# Altium PCB DisplayBoard.PcbDoc
Units mm, origin at the board's own origin, x right, y up, seen from the top; angles counter-clockwise.
Board outline 80 x 64 mm, 2 copper layers (Top Layer, Bottom Layer); 38 components, 43 nets, 152 pads, 6 vias.
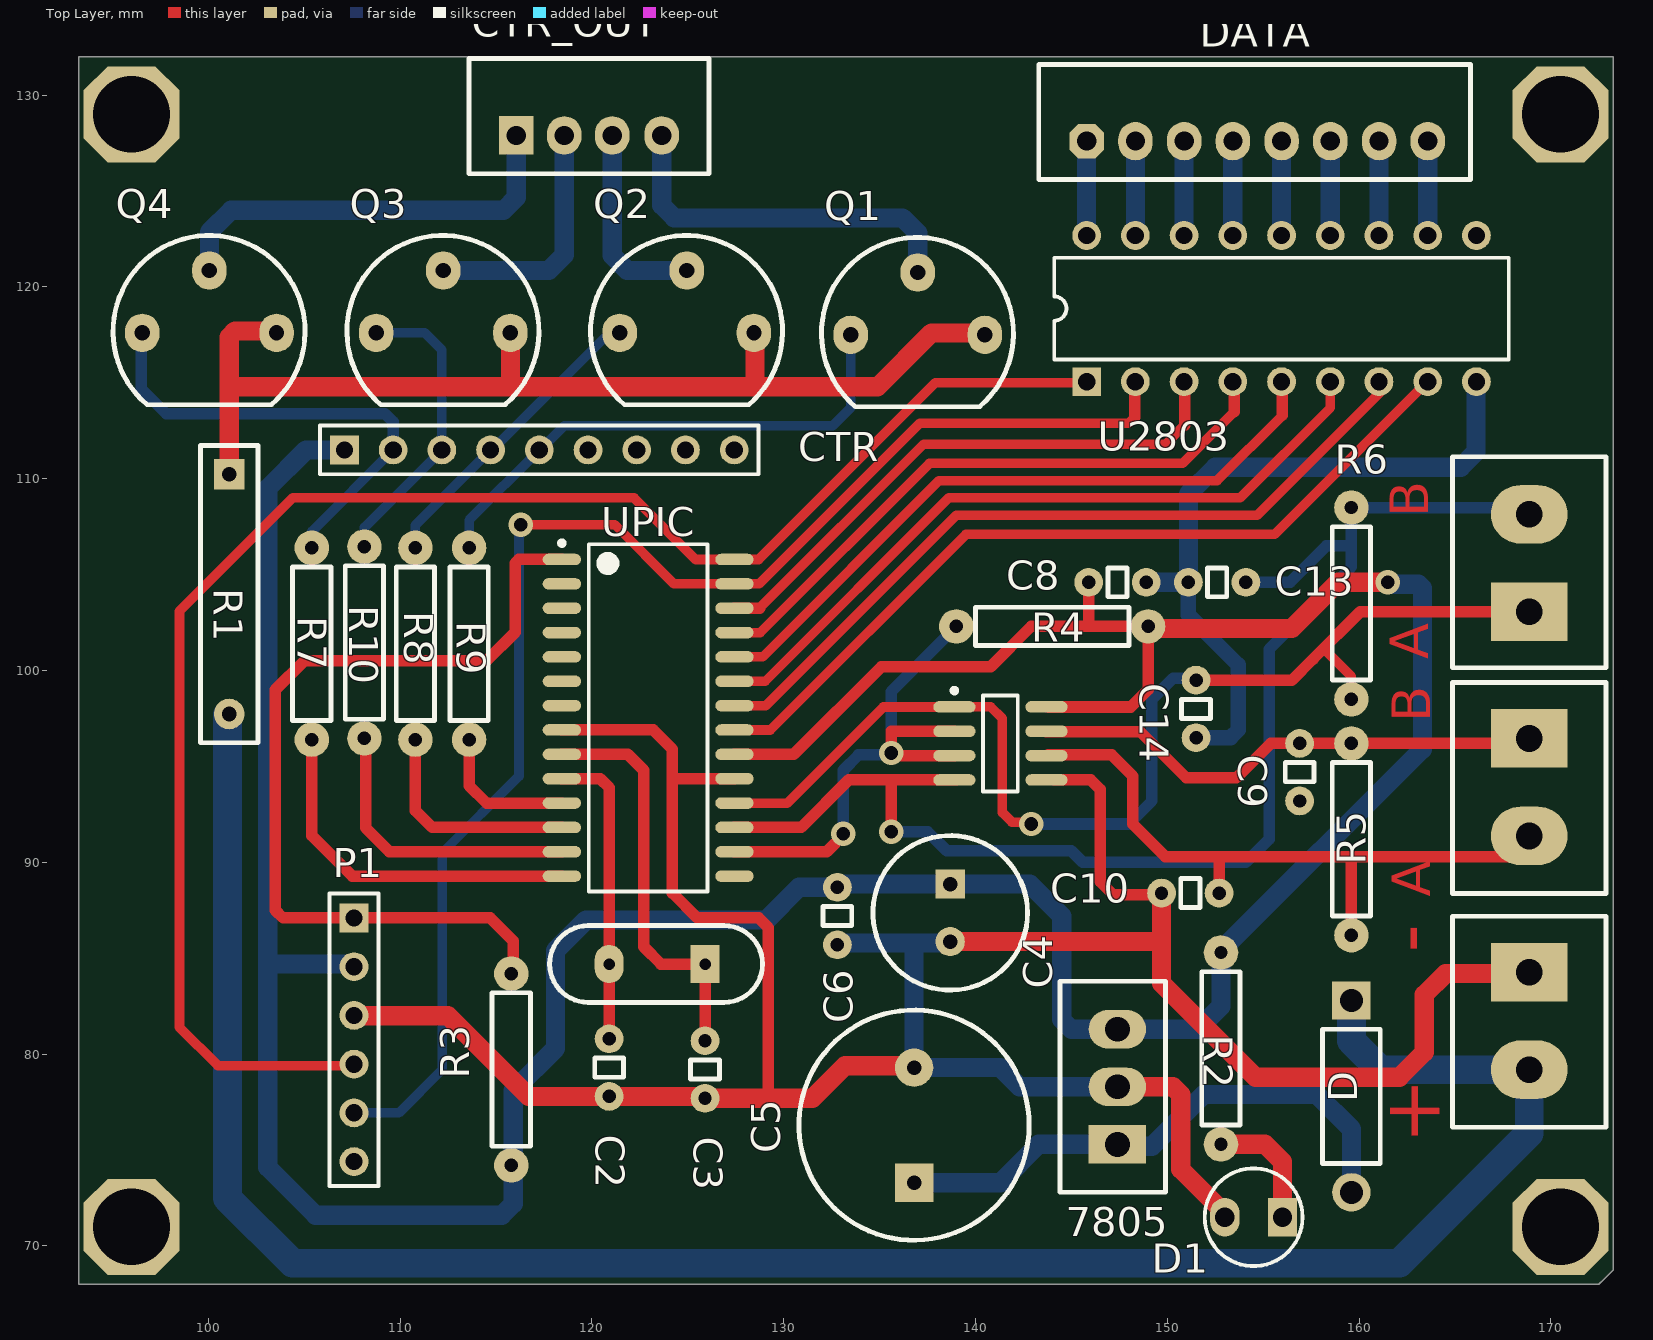
[diagram p0: Top Layer view]
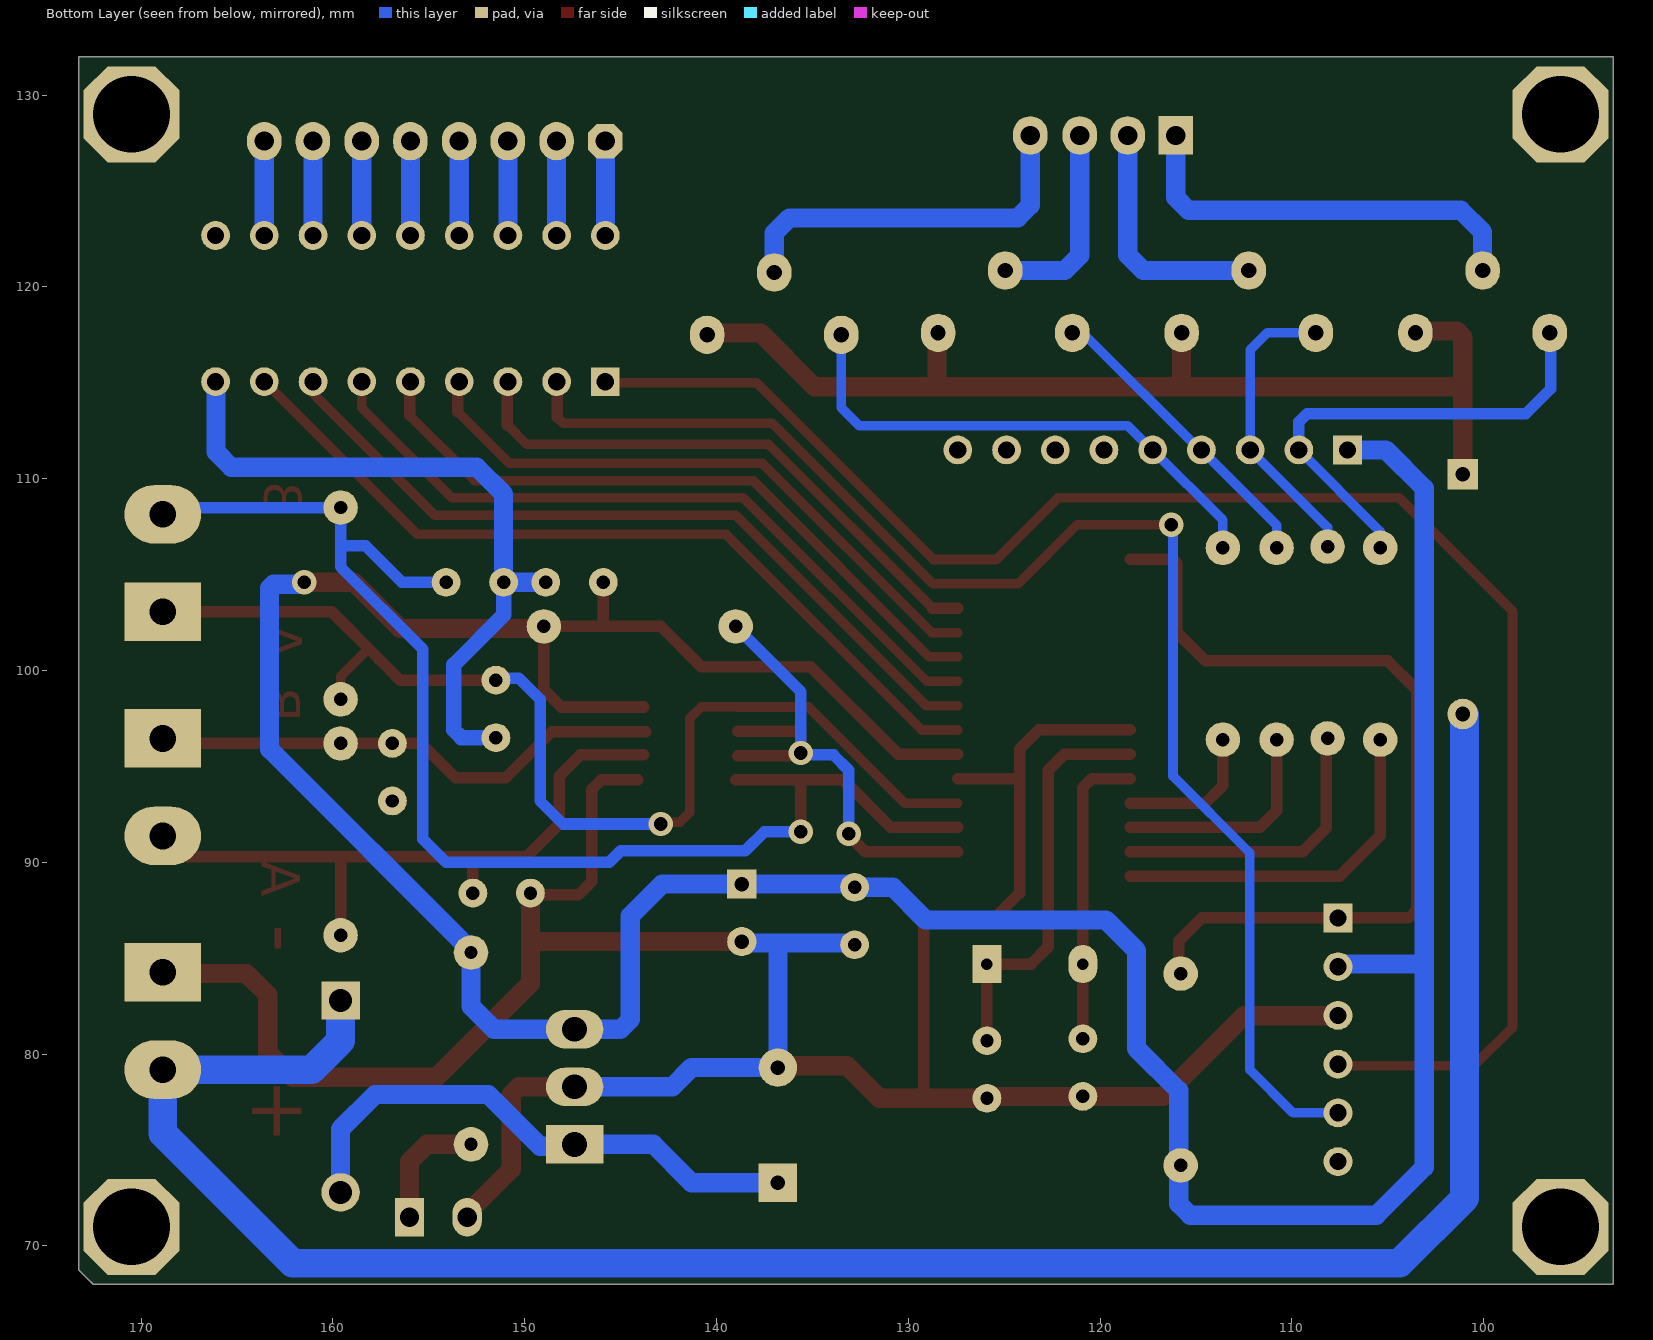
[diagram p1: Bottom Layer view, seen from below]

## Layer stack, top to bottom
Top Layer: signal copper 0.0356
Dielectric: dielectric 0.32, FR-4, Dk 4.8
Bottom Layer: signal copper 0.0356

## Board outline
93.25,132 173.25,132 173.25,68.75 172.75,68.25 172.5,68 93.25,68 93.25,132

## Design rules (kind name [scope] priority, off if disabled: settings)
Clearance [All] p1: gap=0.6
PlaneClearance [All] p1: clearance=1
PlaneConnect [All] p1: planeconnectstyle=Relief reliefexpansion=1 reliefentries=4 reliefconductorwidth=1 reliefairgap=1
PolygonConnect [All] p1: connectstyle=Relief reliefconductorwidth=1 reliefentries=4 polygonreliefangle="90 Angle"
RoutingTopology [All] p1: topology=Vertical
RoutingVias [All] p1: holewidth=1 width=1.5 viastyle="Through Hole" minholewidth=0.711 minwidth=1.27 maxholewidth=1.5 maxwidth=2
SilkscreenOverComponentPads [All] p1: minsilkscreentomaskgap=0.254
SolderMaskExpansion [All] p1: expansion=1
Width [InNet('VCC')] p1: maxlimit=2 minlimit=1 preferedwidth=1
24 further rules are at their usual default settings.

## Components (designator, comment, footprint, x,y, rotation, side; value= is the part's Value field where it differs from the comment)
7805 "Volt Reg" 78xx_NO 147.4,77.8 r90 top
C2 "Cap" tu_gom 120.9,78.8 r270 top
C3 "Cap" tu_gom 125.9,78.7 r270 top
C4 "Cap Pol1" "tu 100uF/50v" 138.684,86.868 r270 top
C5 "Cap Pol1" "TU 470uF/50V" 136.8,73.3 r90 top
C6 "Cap" tu_gom 132.8,86.7 r270 top
C8 "Cap" tu_gom 146.9,104.6 r180 top
C9 "Cap" tu_gom 156.9,95.2 r90 top
C10 "Cap" tu_gom 151.7,88.4 r0 top
C13 "Cap" tu_gom 153.1,104.6 r0 top
C14 "Cap" tu_gom 151.5,98.5 r90 top
CTR "Header 9" HDR1X9 107.1,111.5 r0 top (schematic designator CTR_HEADER)
CTR_OUT "Header 4" "CAP 4" 121.1,127.9 r0 top
D "Diode" D_2A 159.6,82.8 r270 top
D1 "LED0" LED_3 155,71.5 r180 top
DATA "Header 8" Cap_8 145.8,127.6 r0 top
P1 "Header 6" HDR1X6 107.6,87.1 r270 top
Q1 "A1013" A1013 135.992,117.752 r180 top
Q2 "A1013" A1013 123.952,117.856 r180 top
Q3 "A1013" A1013 111.252,117.856 r180 top
Q4 "A1013" A1013 99.06,117.856 r180 top
R1 "22R/1W" R_CS220/470/1W 101.092,110.236 r270 top
R2 "560R" R_Nor 152.8,80.3 r90 top
R3 "10K" R_Nor 115.8,79.2 r270 top
R4 "10K" R_Nor 144,102.3 r0 top
R5 "120R" R_Nor 159.6,91.2 r90 top
R6 "120R" R_Nor 159.6,103.5 r90 top
R7 "1K" R_Nor 105.4,101.4 r90 top
R8 "1K" R_Nor 110.8,101.4 r90 top
R9 "1K" R_Nor 113.6,101.4 r90 top
R10 "1K" R_Nor 108.144,101.462 r90 top
U2803 "ULN2803A" DIP18 155.956,118.872 r0 top
UPIC "PIC16F886-I/SO" SOIC-SO28_L 122.936,97.536 r0 top
? "XTAL" Xtal12M 122.9,86.7 r180 top
? "MAX485CSA" NSO8_N 141.3,96.2 r0 top
? "Header 2" "Header2 - duplicate" 168.87,79.19 r270 top
? "Header 2" "Header2 - duplicate" 168.87,91.382 r270 top
? "Header 2" "Header2 - duplicate" 168.87,108.146 r90 top

## Footprints (in the part's own frame and the unit in brackets; to place one, negate y for a bottom-side part, rotate by r counter-clockwise, add the part's x,y. Pads: shape width x height; smd on the part's side, far side on the other; paste and mask are expansions set on the pad)
78xx_NO [mm]
  rect 2x3 hole 1.3: 1(-2.5,0)
  oval 2x3 hole 1.3: 2(0.5,0) 3(3.5,0)
  silkscreen extent -5,-2.5 6,3
A1013 [mm]
  oval 1.8x2 hole 0.8: 1(-4.5,0.25) 2(-1,-3) 3(2.5,0.25)
  silkscreen extent -5.99,-4.82 4.02,4
"CAP 4" [mm]
  rect 1.8x2 hole 1: 1(-5.04,0)
  oval 1.8x2 hole 1: 2(-2.54,0) 3(-0.04,0) 4(2.54,0)
  silkscreen extent -7.5,-2 5,4
Cap_8 [mm]
  oct 1.8x1.8 hole 1: 1(0,0)
  oval 1.8x2 hole 1: 2(2.54,0) 3(5.08,0) 4(7.62,0) 5(10.16,0) 6(12.7,0) 7(15.24,0) 8(17.78,0)
  silkscreen extent -2.5,-2 20,4
D_2A [mm]
  rect 2x2 hole 1.2: 1(0,0)
  round 2 hole 1.2: 2(10,0)
  silkscreen extent 1.5,-1.5 8.5,1.5
DIP18 [mm] "DIP; 18 Leads; Row Spacing 7.62 mm; Pitch 2.54 mm"
  rect 1.5x1.5 hole 0.9: 1(-10.16,-3.81)
  round 1.5 hole 0.9: 2(-7.62,-3.81) 3(-5.08,-3.81) 4(-2.54,-3.81) 5(0,-3.81) 6(2.54,-3.81) 7(5.08,-3.81) 8(7.62,-3.81) 9(10.16,-3.81) 10(10.16,3.81) 11(7.62,3.81) 12(5.08,3.81) 13(2.54,3.81) 14(0,3.81) 15(-2.54,3.81) 16(-5.08,3.81) 17(-7.62,3.81) 18(-10.16,3.81)
  silkscreen extent -11.85,-2.65 11.85,2.65
HDR1X6 [mm] "Connector; Header; 6 Position"
  rect 1.5x1.5 hole 0.9: 1(0,0)
  round 1.5 hole 0.9: 2(2.54,0) 3(5.08,0) 4(7.62,0) 5(10.16,0) 6(12.7,0)
  silkscreen extent -1.27,-1.27 13.97,1.27
HDR1X9 [mm] "Connector; Header; 9 Position"
  rect 1.5x1.5 hole 0.9: 1(0,0)
  round 1.5 hole 0.9: 2(2.54,0) 3(5.08,0) 4(7.62,0) 5(10.16,0) 6(12.7,0) 7(15.24,0) 8(17.78,0) 9(20.32,0)
  silkscreen extent -1.27,-1.27 21.59,1.27
"Header2 - duplicate" [mm]
  rect 3.048x4 hole 1.4: 1(-5.08,0)
  oval 3.048x4 hole 1.4: 2(0,0)
  silkscreen extent -8,-4 3,4
LED_3 [mm]
  rect 1.524x2 hole 1: 1(-1,0)
  oval 1.524x2 hole 1: 2(2,0)
  silkscreen extent -2.05,-2.55 3.05,2.55
NSO8_N [mm] "SOIC, 8-Leads, Body 4.9x3.9mm, Pitch 1.27mm, IPC Medium Density"
  oval 2.2x0.6 smd: 1(-2.4,1.905) 2(-2.4,0.635) 3(-2.4,-0.635) 4(-2.4,-1.905) 5(2.4,-1.905) 6(2.4,-0.635) 7(2.4,0.635) 8(2.4,1.905)
  silkscreen extent -2.52,-2.5 0.9,2.88, body extent -2,-2.5 2,2.5, height 1.75
R_CS220/470/1W [mm]
  rect 1.6x1.6 hole 0.762: 1(0,0)
  round 1.6 hole 0.762: 2(12.5,0)
  silkscreen extent -1.5,-1.5 14,1.5
R_Nor [mm]
  round 1.8 hole 0.7: 1(-5,0) 2(5,0)
  silkscreen extent -4,-1 4,1
SOIC-SO28_L [mm] "SOIC, 28-Leads, Body 17.9x7.5mm, Pitch 1.27mm, IPC High Density"
  oval 2x0.6 smd: 1(-4.5,8.255) 2(-4.5,6.985) 3(-4.5,5.715) 4(-4.5,4.445) 5(-4.5,3.175) 6(-4.5,1.905) 7(-4.5,0.635) 8(-4.5,-0.635) 9(-4.5,-1.905) 10(-4.5,-3.175) 11(-4.5,-4.445) 12(-4.5,-5.715) 13(-4.5,-6.985) 14(-4.5,-8.255) 15(4.5,-8.255) 16(4.5,-6.985) 17(4.5,-5.715) 18(4.5,-4.445) 19(4.5,-3.175) 20(4.5,-1.905) 21(4.5,-0.635) 22(4.5,0.635) 23(4.5,1.905) 24(4.5,3.175) 25(4.5,4.445) 26(4.5,5.715) 27(4.5,6.985) 28(4.5,8.255)
  silkscreen extent -4.62,-9.05 3.1,9.23, body extent -3.8,-9.06 3.8,9.06, height 2.65
"tu 100uF/50v" [mil]
  rect 60x60 hole 30: 1(-78.74,0)
  round 60 hole 30: 2(39.37,0)
  silkscreen extent -178,-159 139,159
"TU 470uF/50V" [mm]
  rect 2x2 hole 0.762: 1(0,0)
  round 2 hole 0.762: 2(6,0)
  silkscreen extent -3,-6 9,6
tu_gom [mm]
  round 1.5 hole 0.7: 1(-2,0) 2(1,0)
  silkscreen extent -1,-0.75 0,0.75
Xtal12M [mm]
  rect 1.5x2 hole 0.6: 1(-3,2)
  oval 1.5x2 hole 0.6: 2(2,2)
  silkscreen extent -6,0 5.1,4

## Part data
7805: "Voltage Regulator"
C2 C3 C6 C8 C9 C10 C13 C14: library part Ceramic, "Capcitor"
C4 C5: "Polarized Capacitor (Radial)"
CTR: "Header, 9-Pin"
CTR_OUT: "Header, 4-Pin"
D: "Default Diode"
D1: "Typical INFRARED GaAs LED"
DATA: "Header, 8-Pin"
P1: "Header, 6-Pin"
Q1 Q2 Q3 Q4: library part PNP, "PNP Bipolar Transistor"
R1 R2 R3 R4 R5 R6 R7 R8 R9 R10: library part Res
U2803: "Eight Darlington Array"
UPIC: "Flash-Based, 8-Bit CMOS Microcontroller with nanoWatt Technology, 8K (x14-Bit words) Program Memory, 624 Bytes Data Memory, 24 I/O pins, 28-Pin SOIC, Standard VDD Range, Industrial Temperature"
?: "Crystal Oscillator"
?: "Low-Power, Slew-Rate-Limited RS-485/RS-422 Transceiver"
? ? ?: "Header, 2-Pin"

## Free pads (board coordinates)
  oct 5x5 hole 4: 0(96,129) 1(170.5,129) 2(170.5,71) 3(96,71)

## Via types
v1: diameter 1.27, hole 0.711, Top Layer to Bottom Layer, 6 vias

## Nets (pads, with @x,y where several pads share a name; then routed paths per layer and width w, separated by ;. In a path a pad name is that pad's centre, name@x,y a point inside that pad or via, vN(x,y) a via of type N, cw(c..) or ccw(c..) an arc to the next point about the centre after c; other vN are vias at no path point)
+12V: ?.2@168.87,79.19 D.1 R1.2 | length 112.7
  Bottom Layer w1.5: R1.2@101,97.7 101,72.5 104.4,69.1 162.1,69.1 168.87,75.87 168.87,79.19 161.11,79.19 159.6,80.7 D.1@159.6,82.9
A1: CTR.2 Q4.3 R7.2 | length 25.1
  Bottom Layer w0.5: R7.2 105.4,107.26 CTR.2
  Bottom Layer w0.6: Q4.3@96.5,117.6 96.5,114.7 97.8,113.4 109.2,113.4 109.64,112.96 CTR.2
A2: CTR.3 Q3.3 R10.2 | length 15.7
  Bottom Layer w0.5: R10.2 108.144,107.464 CTR.3 112.18,116.72 111.294,117.606 Q3.3
A3: CTR.4 Q2.3 R8.2 | length 16
  Bottom Layer w0.5: R8.2 110.8,107.58 CTR.4 114.8,111.5 120.906,117.606 Q2.3
A4: CTR.5 Q1.3 R9.2 | length 27.6
  Bottom Layer w0.5: R9.2 113.6,107.84 CTR.5 117.3,111.5 118.554,112.754 132.554,112.754 133.492,113.692 Q1.3
DI: ?.2@168.87,108.146 ?.4 C13.2 R6.2 UPIC.17 | length 70.7
  Top Layer w0.6: UPIC.17 130.921,91.821 133.4,94.3 135.6,94.3 ; v1(135.6,91.6) 135.6,94.3 ; ?.4@139,94.3 135.6,94.3
  Bottom Layer w0.6: v1(135.6,91.6) 137.5,91.6 138.5,90.6 145,90.6 145.6,90 154.1,90 155.304,91.204 155.304,101.104 159.6,105.4 159.6,106.5 ; C13.2 156.4,104.6 158.3,106.5 159.6,106.5 ; ?.2@168.8,108.5 R6.2 159.6,106.5
EN: ?.2@138.9,96.835 ?.3 R4.1 UPIC.16 | length 28
  Top Layer w0.6: UPIC.16 132.251,90.551 v1@133.2,91.5 ; v1(135.6,95.7) 135.6,96.835 ?.2@138.9,96.835 ; v1@135.635,95.565 ?.3
  Bottom Layer w0.6: v1(133.1,91.5) 133.1,94.8 133.9,95.6 v1@135.6,95.6 ; v1(135.6,95.7) 135.6,98.9 R4.1
GND: 7805.2 ?.1@168.87,84.27 ?.5 C2.2 C3.2 C4.2 C5.2 C6.2 C8.1 C9.1 C10.1 C13.1 C14.1 D1.2 P1.3 U2803.9 UPIC.8 UPIC.19 | length 185.7
  Top Layer w0.6: UPIC.8 123.199,96.901 124.2,95.9 124.2,88.4 125.5,87.1 128.7,87.1 129.2,86.6 129.2,77.8 ; 124.2,94.361 UPIC.19 ; ?.5@144.1,94.3 146,94.3 146.5,93.8 146.5,89 147.2,88.3 C10.1@149,88.3
  Top Layer w1: P1.3@107.5,82 112.5,82 116.7,77.8 C2.2 C3.2@125.9,77.8 ; C3.2 131.5,77.7 133.2,79.4 C5.2@136.8,79.4 ; C4.2 149.6,85.868 ; 7805.2 150.3,78.3 150.7,77.9 150.7,74 D1.2@153,71.7 ; C10.1 149.7,83.7 154.6,78.8 162.1,78.8 163.4,80.1 163.4,83.1 164.5,84.2 ?.1@168.8,84.2
  Bottom Layer w0.8: C13.1 151.1,102.9 153.7,100.3 153.7,96.9 153.3,96.5 C14.1
  Bottom Layer w1: C6.2@132.8,85.8 138.6,85.8 C4.2@138.7,85.9 ; 136.8,85.7 C5.2 141.3,79.3 142.3,78.3 7805.2 ; C8.1 C13.1 151.1,109.2 152.5,110.6 165.3,110.6 166.1,111.4 U2803.9@166.1,115.1
ICSPCLK: P1.5 U2803.2 UPIC.27 | length 74.4
  Top Layer w0.5: v1(116.3,107.6) 121.2,107.6 124.279,104.521 UPIC.27 128.721,104.521 137.1,112.9 148,112.9 148.3,113.2
  Top Layer w0.6: 148.3,113.2 U2803.2@148.3,115
  Bottom Layer w0.5: P1.5 109.94,76.94 112.2,79.2 112.2,90.5 116.2,94.5 v1@116.2,107.7
ICSPDAT: P1.4 U2803.1 UPIC.28 | length 86.4
  Top Layer w0.5: P1.4@107.6,79.4 100.5,79.4 98.5,81.4 98.5,103.1 104.4,109 122.2,109 125.409,105.791 UPIC.28 128.691,105.791 137.9,115 U2803.1@145.7,115
IN3: U2803.3 UPIC.26 | length 29.8
  Top Layer w0.5: 128.751,103.251 137.3,111.8 149.9,111.8 150.9,112.8
  Top Layer w0.6: UPIC.26 128.751,103.251 ; 150.9,112.8 U2803.3@150.9,115.2
IN4: U2803.4 UPIC.25 | length 32.4
  Top Layer w0.5: UPIC.25 128.781,101.981 137.6,110.8 150.8,110.8 153.5,113.5
  Top Layer w0.6: 153.5,113.5 U2803.4@153.5,115.1
IN5: U2803.5 UPIC.24 | length 35.6
  Top Layer w0.5: UPIC.24 128.911,100.711 138.1,109.9 152.6,109.9 156,113.3
  Top Layer w0.6: 156,113.3 U2803.5@156,115.1
IN6: U2803.6 UPIC.23 | length 38.3
  Top Layer w0.5: UPIC.23 129.041,99.441 138.6,109 153.8,109 158.5,113.7 U2803.6@158.5,115
IN7: U2803.7 UPIC.22 | length 40.4
  Top Layer w0.5: UPIC.22 129.071,98.171 139,108.1 154.7,108.1 U2803.7@161.1,114.5
IN8: U2803.8 UPIC.21 | length 43.7
  Top Layer w0.5: UPIC.21 129.301,96.901 139.5,107.1 155.6,107.1 U2803.8@163.6,115.1
LVP: P1.6
MCLR: P1.1 R3.1 UPIC.1 | length 46.2
  Top Layer w0.6: R3.1@115.9,84.1 115.9,85.9 114.7,87.1 P1.1 103.9,87.1 103.5,87.5 103.5,99 105,100.5 114.5,100.5 116,102 116,105.6 116.191,105.791 UPIC.1
Net18,432Mhz_1: ?.1@125.9,84.7 C3.1 UPIC.9 | length 21.4
  Top Layer w0.6: UPIC.9 121.869,95.631 122.7,94.8 122.7,85.6 123.6,84.7 125.9,84.7 C3.1
Net18,432Mhz_2: ?.2@120.9,84.7 C2.1 UPIC.10 | length 15.8
  Top Layer w0.6: UPIC.10 120.439,94.361 120.9,93.9 120.9,84.8 C2.1
Net7805_1: 7805.1 C5.1 D.2 | length 28.6
  Bottom Layer w1: C5.1 141.3,73.3 143.3,75.3 7805.1@147.4,75.3 ; 7805.1@147.5,75.2 149.2,75.2 151.9,77.9 157.8,77.9 159.6,76.1 D.2@159.6,72.9
NetC9_2: ?.1@168.87,96.462 ?.7 C9.2 R5.2 | length 27
  Top Layer w0.6: ?.7@143.7,96.8 148.6,96.8 151,94.4 153.6,94.4 155.4,96.2 C9.2 R5.2 ?.1@168.8,96.2 ; ?.1@168.8,96.4 ?.1@169,96.4
NetC10_2: ?.2@168.87,91.382 ?.6 C10.2 R5.1 | length 35
  Top Layer w0.6: ?.6@143.8,95.6 147.1,95.6 148.2,94.5 148.2,92 149.9,90.3 152.6,90.3 152.7,90.2 C10.2 ; 152.7,90.3 167.77,90.3 ?.2@168.87,91.4 ; R5.1 159.6,90.2
NetCTR_OUT_1: CTR_OUT.1 Q4.2 | length 22
  Bottom Layer w1: Q4.2 100.06,122.86 101.2,124 115.4,124 116.06,124.66 CTR_OUT.1
NetCTR_OUT_2: CTR_OUT.2 Q3.2 | length 12.9
  Bottom Layer w1: Q3.2 117.756,120.856 118.56,121.66 CTR_OUT.2
NetCTR_OUT_3: CTR_OUT.3 Q2.2 | length 10.5
  Bottom Layer w1: CTR_OUT.3 121.06,121.64 121.844,120.856 Q2.2
NetCTR_OUT_4: CTR_OUT.4 Q1.2 | length 19.6
  Bottom Layer w1: CTR_OUT.4 123.64,124.26 124.3,123.6 136.2,123.6 136.992,122.808 Q1.2
NetDATA_1: DATA.1 U2803.18 | length 4.9
  Bottom Layer w0.5: DATA.1@145.796,127.596 DATA.1
  Bottom Layer w1: U2803.18 DATA.1@145.796,127.596
NetDATA_2: DATA.2 U2803.17 | length 4.9
  Bottom Layer w0.5: DATA.2@148.336,127.596 DATA.2
  Bottom Layer w1: U2803.17 DATA.2@148.336,127.596
NetDATA_3: DATA.3 U2803.16 | length 4.9
  Bottom Layer w0.5: DATA.3@150.876,127.596 DATA.3
  Bottom Layer w1: U2803.16 DATA.3@150.876,127.596
NetDATA_4: DATA.4 U2803.15 | length 4.9
  Bottom Layer w0.5: DATA.4@153.416,127.596 DATA.4
  Bottom Layer w1: U2803.15 DATA.4@153.416,127.596
NetDATA_5: DATA.5 U2803.14 | length 4.9
  Bottom Layer w0.5: DATA.5@155.956,127.596 DATA.5
  Bottom Layer w1: U2803.14 DATA.5@155.956,127.596
NetDATA_6: DATA.6 U2803.13 | length 4.9
  Bottom Layer w0.5: DATA.6@158.496,127.596 DATA.6
  Bottom Layer w1: U2803.13 DATA.6@158.496,127.596
NetDATA_7: DATA.7 U2803.12 | length 4.9
  Bottom Layer w0.5: DATA.7@161.036,127.596 DATA.7
  Bottom Layer w1: U2803.12 DATA.7@161.036,127.596
NetDATA_8: DATA.8 U2803.11 | length 4.9
  Bottom Layer w0.5: DATA.8@163.576,127.596 DATA.8
  Bottom Layer w1: U2803.11 DATA.8@163.576,127.596
NetDLED_1: D1.1 R2.1 | length 6.4
  Top Layer w1: R2.1 155.1,75.3 156,74.4 D1.1@156,71.6
NetQ1_1: Q1.1 Q2.1 Q3.1 Q4.1 R1.1 | length 55.8
  Top Layer w1: R1.1 101.092,114.8 ; Q4.1@103.6,117.7 101.4,117.7 101.092,117.392 101.092,114.8 ; 115.752,114.948 Q3.1 ; Q2.1@128.5,117.6 128.5,114.8 ; Q1.1@140.5,117.6 137.7,117.6 134.9,114.8 128.5,114.8 ; 101.092,114.8 128.5,114.8
NetR7_1: R7.1 UPIC.14 | length 18.9
  Top Layer w0.6: R7.1 105.4,91.4 107.519,89.281 UPIC.14
NetR8_1: R8.1 UPIC.12 | length 11.7
  Top Layer w0.6: R8.1 110.8,92.7 111.679,91.821 UPIC.12
NetR9_1: R9.1 UPIC.11 | length 7.7
  Top Layer w0.6: R9.1@113.6,96.5 113.6,94 114.509,93.091 UPIC.11
NetR10_1: R10.1 UPIC.13 | length 15.5
  Top Layer w0.6: R10.1@108.2,96.5 108.2,91.8 109.449,90.551 UPIC.13
RO: ?.1@138.9,98.105 ?.1@168.87,103.066 C14.2 R6.1 UPIC.18 | length 59.7
  Top Layer w0.5: UPIC.18 130.191,93.091 135.2,98.1 ?.1@138.9,98.1 ; ?.1@138.9,98.105 140.795,98.105 141.4,97.5 141.4,92.6 141.9,92.1 v1@142.8,92.1 ; 158.2,101.1 159.6,99.7 R6.1
  Top Layer w0.6: C14.2 156.5,99.5 157.6,100.6 160.066,103.066 ?.1@168.87,103.066
  Bottom Layer w0.6: v1(142.9,92) 148,92 149.2,93.2 149.2,98.5 150.3,99.6 C14.2@151.5,99.6
VCC: 7805.3 ?.8 C4.1 C6.1 C8.2 CTR.1 P1.2 R2.2 R3.2 R4.2 UPIC.20 | length 194.1
  Top Layer w0.6: UPIC.20 130.531,95.631 135.1,100.2 140.8,100.2 142.9,102.3 R4.2 R4.2@149.1,102.3 ; C4.1@138.646,88.9 C4.1@138.7,88.954 ; ?.8@143.8,98.1 148.1,98.1 149,99 R4.2@149,102.4 ; 145.9,102.4 C8.2
  Top Layer w1: R4.2@149.2,102.2 153.7,102.2 ; 152.7,102.2 156.5,102.2 158.9,104.6 v1(161.5,104.6)
  Bottom Layer w1: 103.2,84.7 P1.2@107.696,84.7 ; CTR.1 105.1,111.5 103.1,109.5 103.1,74.1 105.6,71.6 115.3,71.6 115.9,72.2 115.9,78.1 118.1,80.3 118.1,85.4 119.7,87 129.1,87 130.8,88.7 C6.1 ; C6.1@132.732,88.868 C4.1 142.832,88.868 144.5,87.2 144.5,81.8 145,81.3 7805.3 151.6,81.3 152.8,82.5 R2.2 ; R2.2@152.8,85.5 R2.2 ; v1@161.5,104.5 163.1,104.5 163.3,104.3 163.3,95.9 152.8,85.4 R2.2
pads on no net: CTR.6 CTR.7 CTR.8 CTR.9 U2803.10 UPIC.2 UPIC.3 UPIC.4 UPIC.5 UPIC.6 UPIC.7 UPIC.15

## Other copper
Top Layer:
  text "B" at 163.6,108 h2 r90
  text "A" at 163.6,100.6 h2 r90
  text "B" at 163.7,97.3 h2 r90
  text "A" at 163.7,88.2 h2 r90
  text "-" at 164,85.3 h3 r90
  text "+" at 164.2,75.3 h3 r90